# EAGLE board Headers (EAGLE 8.0.1)
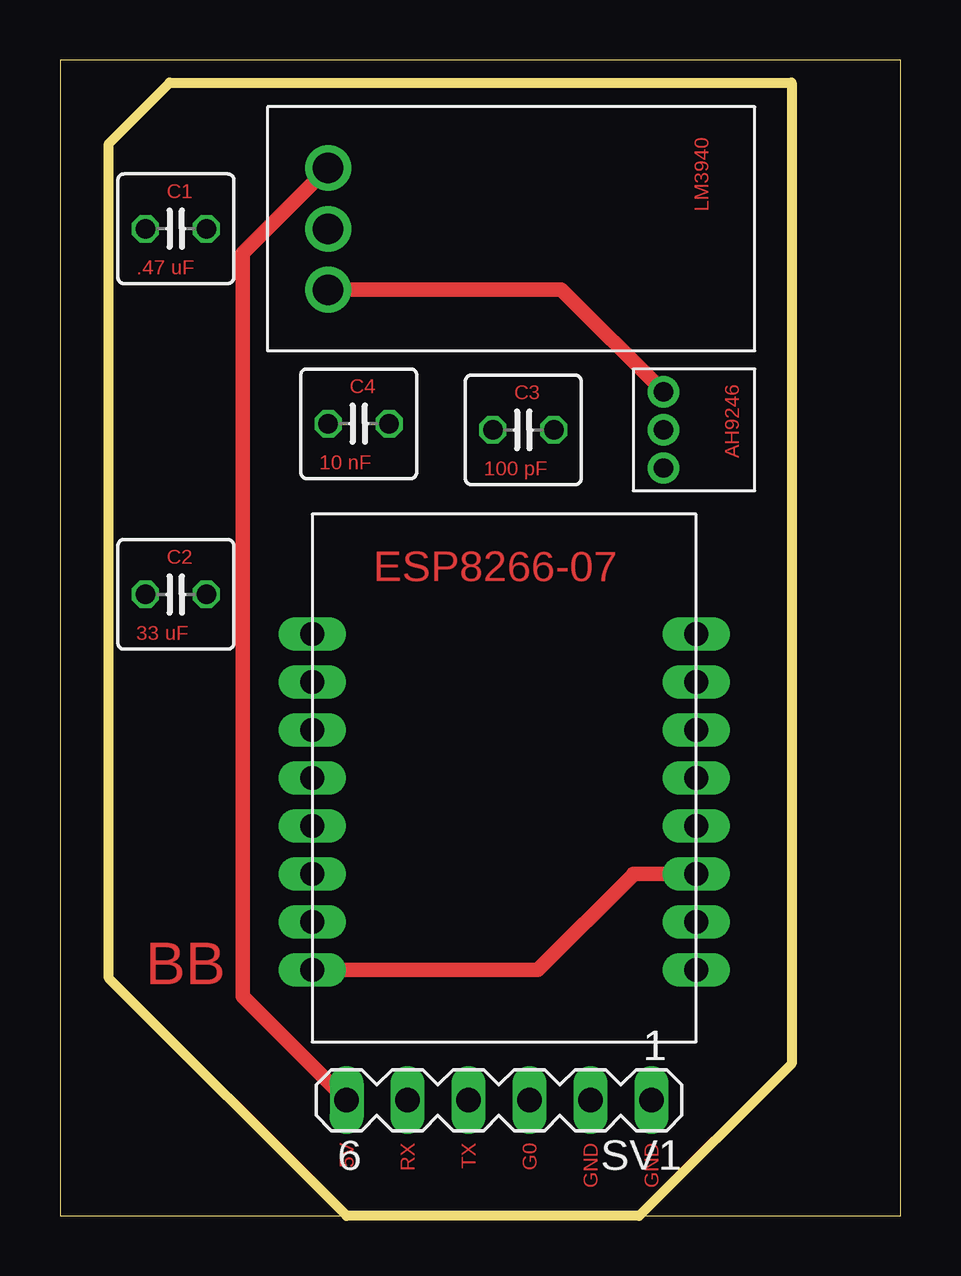
[diagram p0: board, top side]
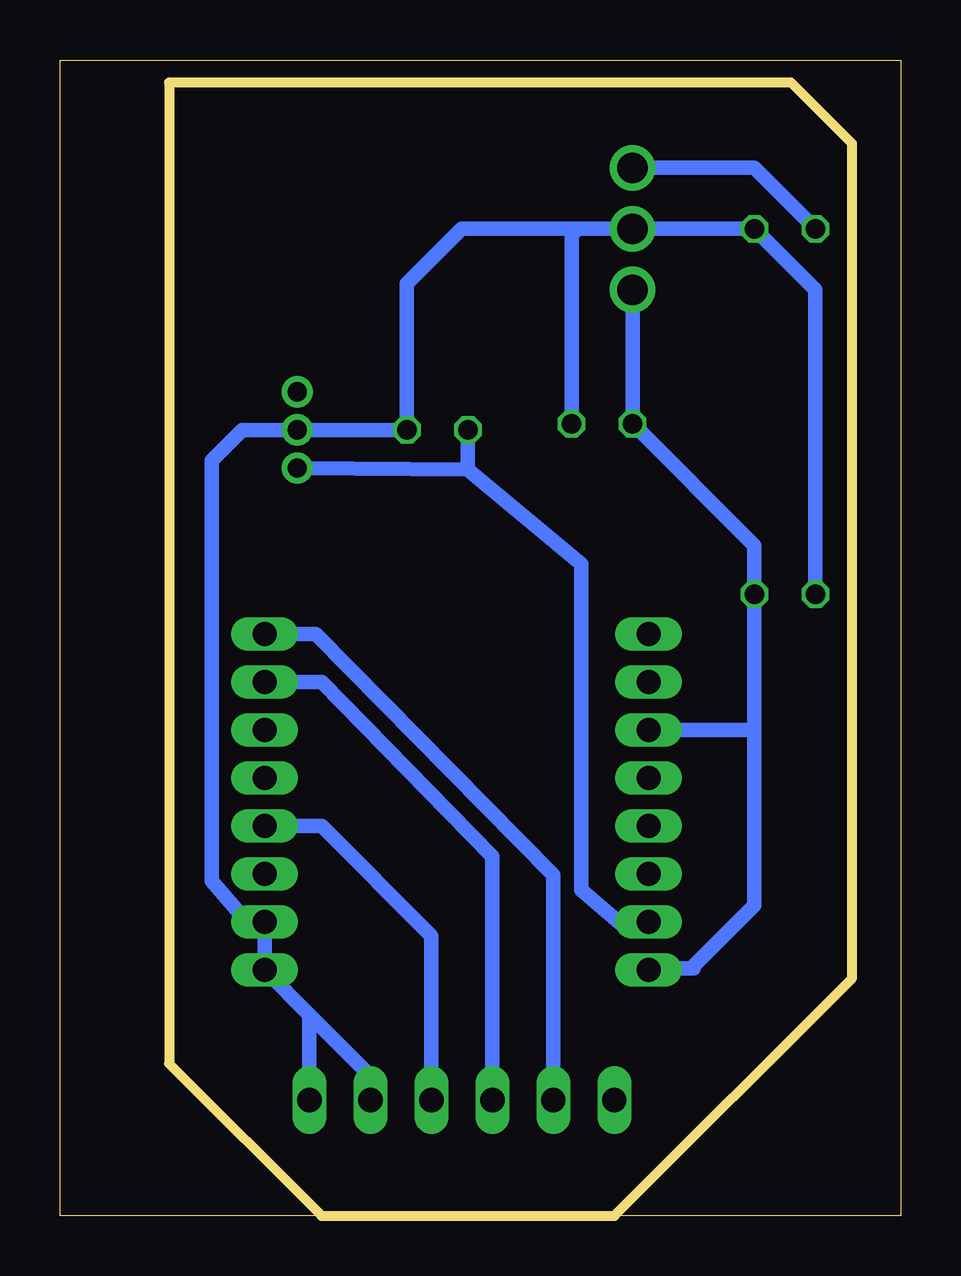
[diagram p1: board, bottom side, seen from below]

Size 35.03 x 48.18 mm. Coordinates in mm from the lower left corner, seen from the top.
Outline: 24.13,0 0,0 0,48.18 35.03,48.18 35.03,0 24.13,0
Outline: 24.13,0 30.48,6.35 30.48,47.24 4.57,47.24 2.03,44.7 2.03,9.91 11.94,0 24.13,0
Copper layers (1*16): Top 0.035mm / dielectric 1.5mm / Bottom 0.035mm
Design rules "default *": minimum track width 10mil, minimum drill 24mil, track to track 8mil, track to pad 8mil, pad to pad 8mil, via to via 8mil, smd to smd 8mil, copper to edge 40mil, drill to drill 8mil, minimum pad ring 0mil, minimum via ring 8mil, stop-mask expansion 4mil, vias tented up to drill 0mil, thermal gap 10mil

## Footprints (pad centres in the part's own frame; a part is rotated, then mirrored left to right if it is on the bottom)
C025-050X050 = drill 0.813 octagon: 1 -1.27,0; 2 1.27,0
MA06-1 = drill 1.016 long: 1 -6.35,0; 2 -3.81,0; 3 -1.27,0; 4 1.27,0; 5 3.81,0; 6 6.35,0
ESP8266-07 = drill 1 pad 1.2 long: ADC -6,6; EN -6,4; GND 10,-6; GPIO0 10,0; GPIO2 10,-2; GPIO4 10,2; GPIO5 10,4; GPIO12 -6,-2; GPIO13 -6,-4; GPIO14 -6,0; GPIO15 10,-4; GPIO16 -6,2; RST -6,8; RXD0 10,6; TXD0 10,8; VCC -6,-6
LM3940 = drill 1.27 pad 1.905: GND 0,0; IN -2.54,0; OUT 2.54,0
AH9246 = drill 0.8 pad 1.3: GND 0,0; OUT 1.587,0; VDD -1.587,0

## Placement (x,y rotation side)
C1  .47 uF  [C025-050X050]  4.83,41.15 0 top
C2  33 uF  [C025-050X050]  4.83,25.91 0 top
C3  100 pF  [C025-050X050]  19.3,32.77 0 top
C4  10 nF  [C025-050X050]  12.45,33.02 0 top
SV1  Header  [MA06-1]  18.29,4.83 180 top
U$1  ESP8266-07  [ESP8266-07]  16.51,16.26 0 top
U$2  LM3940  [LM3940]  11.18,41.15 270 top
U$3  AH9246  [AH9246]  25.15,32.77 270 top

## Library data of the parts
C1-C4 = rcl
SV1 = con-lstb; OC_FARNELL: unknown; OC_NEWARK: unknown
U$1-U$3 = IoT

## Nets
N$1: C3.1 U$1.GPIO13 U$3.OUT
N$3: C2.2 C4.1 U$1.EN U$1.GPIO2 U$1.VCC U$2.OUT U$3.VDD
N$4: C1.1 SV1.6 U$2.IN
N$5: C1.2 C2.1 C3.2 C4.2 SV1.1 SV1.2 U$1.GND U$1.GPIO15 U$2.GND U$3.GND
N$7: SV1.5 U$1.TXD0
N$8: SV1.4 U$1.RXD0
N$9: SV1.3 U$1.GPIO0

## Tracks (layer width: path | path; a pad name or v marks a point on that pad's centre or on a via)
N$1
  Bottom 0.61: U$1.GPIO13 11.68,12.19 13.3,13.59 13.3,27.18 18.03,31.11 | 18.03,31.11 U$3.OUT | C3.1 18.03,31.11
N$3
  Top 0.406: 23.88,14.22 23.88,14.26
  Top 0.61: U$1.VCC 19.91,10.26 23.88,14.22 | 23.88,14.26 U$1.GPIO2 | U$2.OUT 20.89,38.61 U$3.VDD
  Bottom 0.406: U$1.VCC 10.51,10.32
  Bottom 0.61: 10.51,10.32 8.64,10.32 8.64,10.41 6.1,12.95 6.1,20.26 | 6.1,20.26 C2.2 6.1,27.94 C4.1 U$2.OUT | U$1.EN 6.1,20.26
N$4
  Top 0.61: U$2.IN 7.62,40.13 7.62,9.14 SV1.6
  Bottom 0.61: C1.1 6.1,43.69 U$2.IN
N$5
  Bottom 0.61: SV1.1 24.64,8.38 | 24.64,8.38 U$1.GND 26.51,12.19 | SV1.2 22.1,5.84 24.64,8.38 | C2.1 3.56,38.61 C1.2 U$2.GND 13.46,41.15 | 13.46,41.15 18.29,41.15 20.57,38.86 C3.2 U$3.GND 27.43,32.77 28.7,31.5 28.7,13.97 27.18,12.19 26.51,12.19 | U$1.GPIO15 26.51,12.19 | C4.2 13.72,40.89 13.46,41.15
N$7
  Bottom 0.61: SV1.5 14.48,14.22 24.38,24.26 U$1.TXD0
N$8
  Bottom 0.61: SV1.4 17.02,14.99 24.13,22.26 U$1.RXD0
N$9
  Bottom 0.61: U$1.GPIO0 24.13,16.26 19.56,11.68 SV1.3

## Text on the board
Top: BB | 5V | RX | TX | G0 | GND | GND